# Altium PCB interface.PcbDoc (part 2 of 2)
Units mm, origin at the board's own origin, x right, y up, seen from the top; angles counter-clockwise.
Board outline 50 x 100 mm, 4 copper layers (Top Copper, GND, Supply, Bot Copper), stack 1.56 mm thick; 82 components, 62 nets, 291 pads, 101 vias.
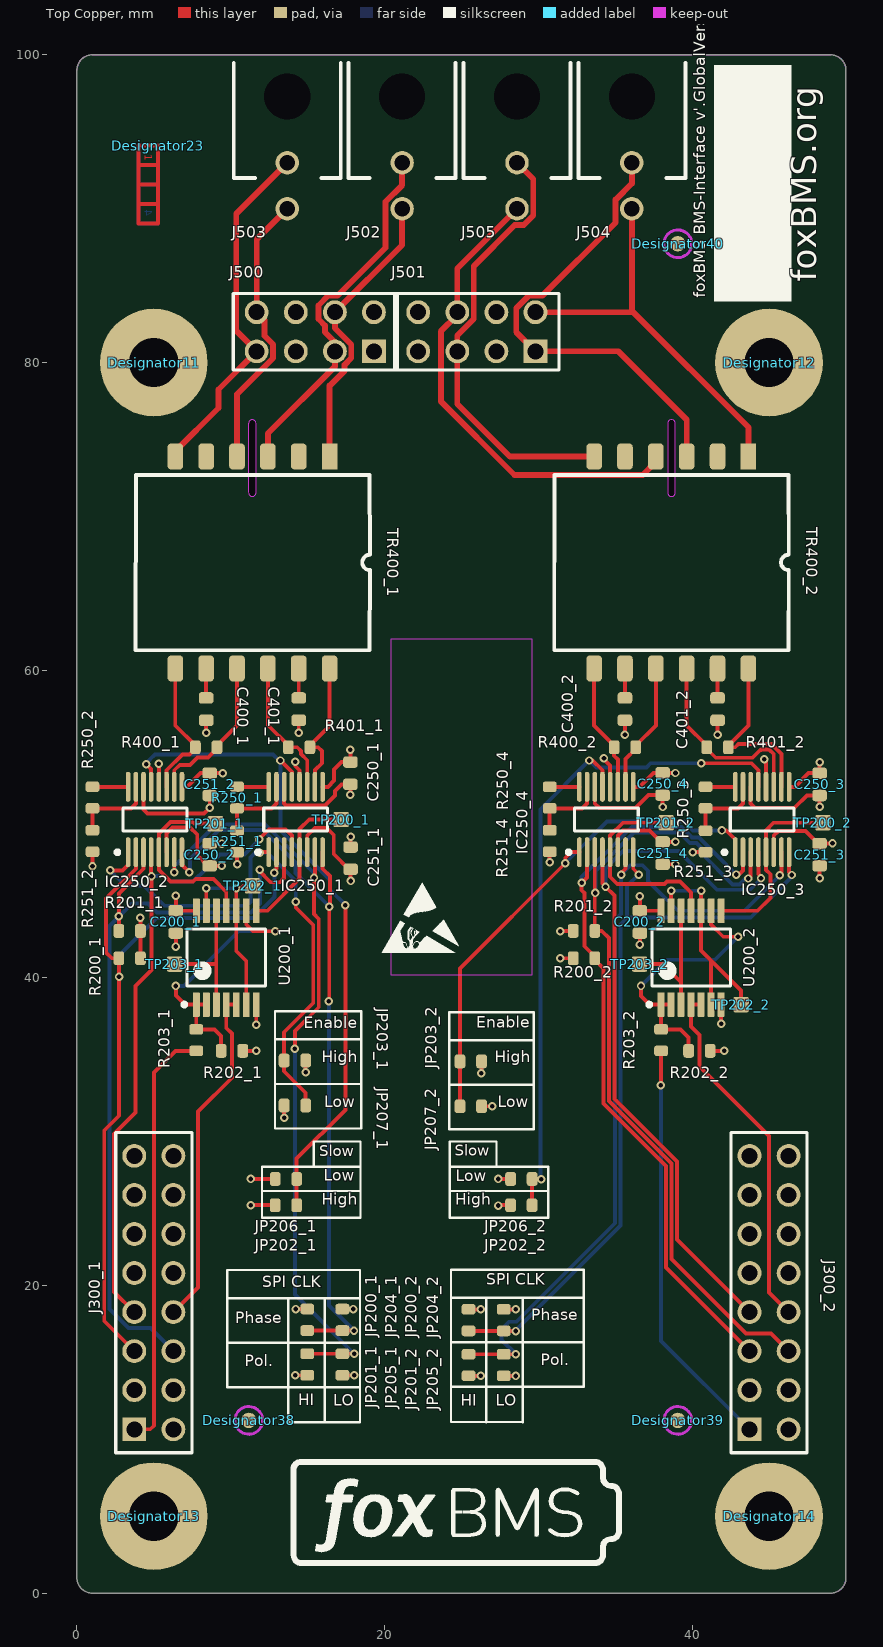
[diagram p0: Top Copper view]

## Silkscreen, mask and mechanical layers (free items; w line width, h text height) (continued)
Mechanical 1: (continued)
  lines w0.5: 11.405,71.552 11.405,76.022 ; 38.655,71.552 38.655,76.022
Mechanical 21:
  lines w0: 5,5 45,5 45,80 5,80

## Dimensions
15.5,82 to 1,0 on Board_Outline
26,82 to 0,99 on Board_Outline
15.5,82 to 0,99 on Board_Outline
50,1 to 0,1.729 on Board_Outline
48.045,100 to 48.044,-0.022 on Board_Outline
45,80 to 39.559,99.507 on Board_Outline
5,80 to 10.196,99.507 on Board_Outline
5,80 to 45,80 on Board_Outline
45,80 to 45,5 on Mechanical 7
45,5 to 5,5 on Mechanical 7

## Text inside footprints (layer, text, board x,y; h text height)
Designator23: Top Copper "1" at 4.402,93.548 h0.51 r270; GND "2" at 4.402,92.38 h0.51 r270; Bot Copper "4" at 4.402,89.509 h0.51 r270; Supply "3" at 4.402,91.11 h0.51 r270